# Altium PCB Armadeus.PcbDoc (part 2 of 3)
Units mm, origin at the board's own origin, x right, y up, seen from the top; angles counter-clockwise.
Board outline 152.4 x 101.6 mm, 6 copper layers (Top Layer, MidLayer1, MidLayer2, MidLayer3, MidLayer4, Bottom Layer); 160 components, 306 nets, 1227 pads, 661 vias.
Unrouted connection lines stored in the file: 23.
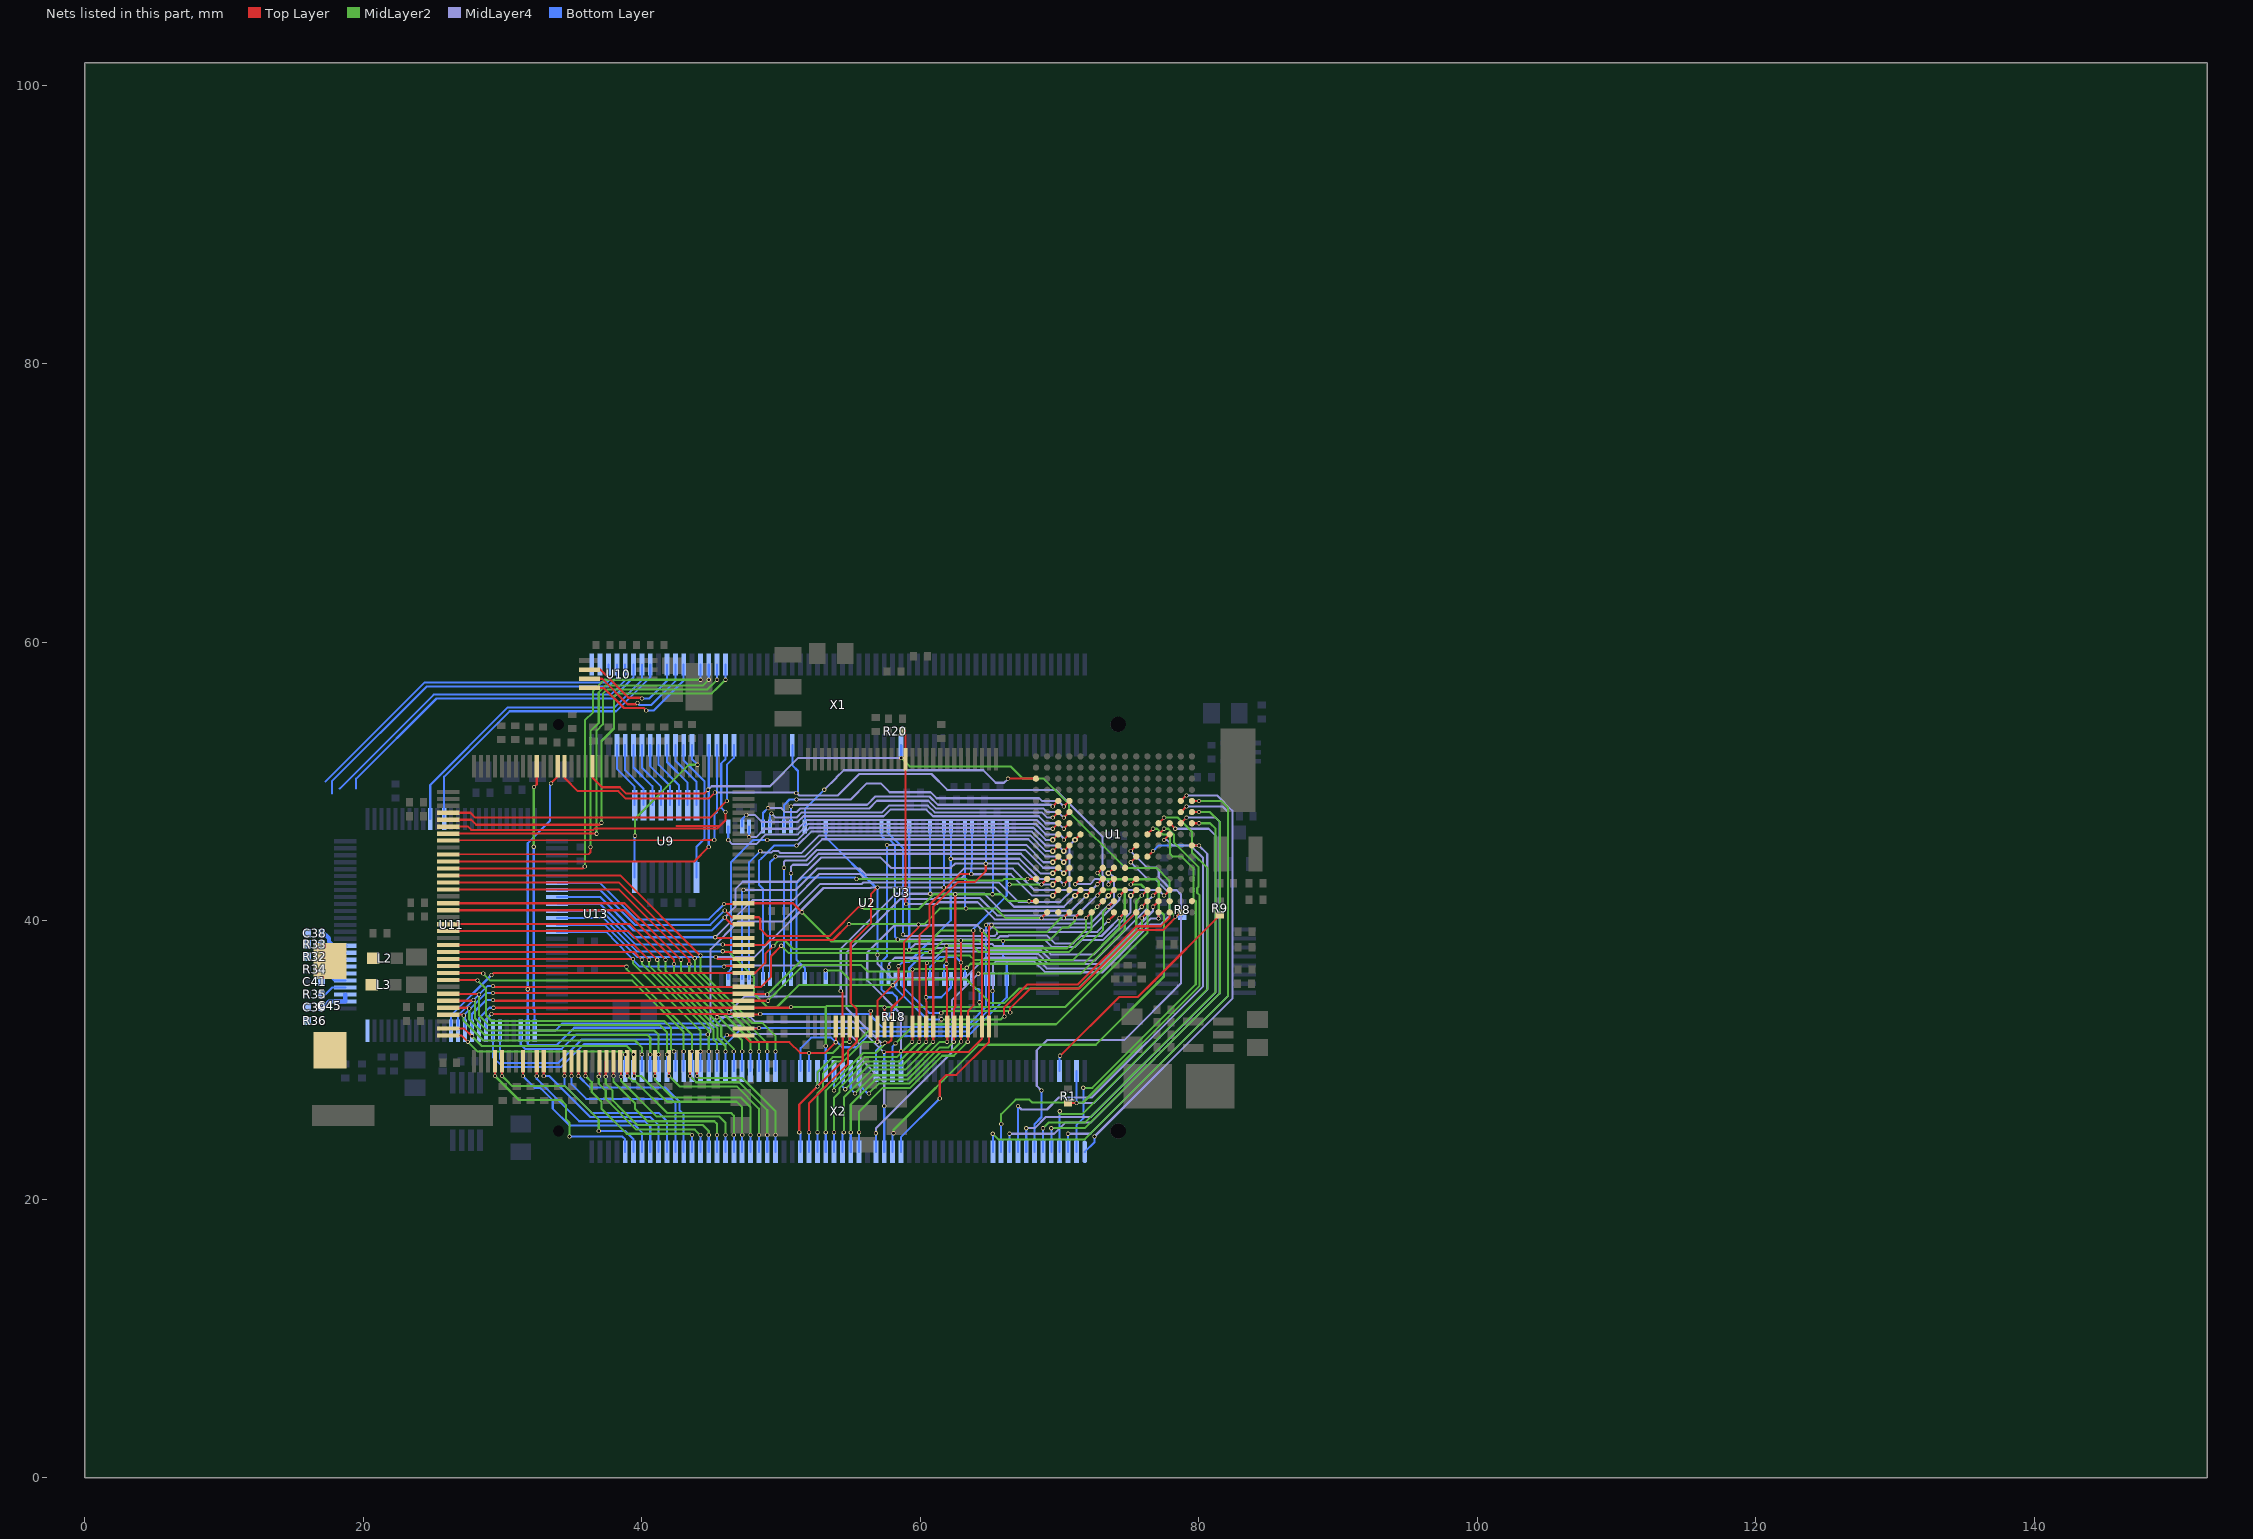
[diagram p6: the nets of this part, all layers, seen from the top]

## Via types
v1: diameter 0.3, hole 0.2, Top Layer to MidLayer2, 182 vias
v2: diameter 0.3, hole 0.2, Top Layer to Bottom Layer, 180 vias
v3: diameter 0.3, hole 0.2, MidLayer2 to Bottom Layer, 120 vias
v4: diameter 0.3, hole 0.2, MidLayer4 to Bottom Layer, 73 vias
v5: diameter 0.3, hole 0.2, Top Layer to MidLayer4, 49 vias
v6: diameter 0.3, hole 0.2, Top Layer to MidLayer3, 34 vias
v7: diameter 0.4, hole 0.2, Top Layer to MidLayer4, 15 vias
v8: diameter 0.3, hole 0.2, Top Layer to MidLayer1, 6 vias
v9: diameter 0.3, hole 0.2, MidLayer2 to MidLayer4, 2 vias

## Nets (pads, with @x,y where several pads share a name; then routed paths per layer and width w, separated by ;. In a path a pad name is that pad's centre, name@x,y a point inside that pad or via, vN(x,y) a via of type N, cw(c..) or ccw(c..) an arc to the next point about the centre after c; other vN are vias at no path point) (continued)
ADC0: U9.1 X1.57 | length 4.8
  Bottom Layer w0.15: X1.57@38.2,52.6 38.2,50.9 39.478,49.622 U9.1@39.478,48.3
ADC1: U9.2 X1.56 | length 4.8
  Bottom Layer w0.15: X1.56@38.8,52.6 38.8,50.8 40.113,49.487 U9.2@40.113,48.3
ADC2: U9.3 X1.55 | length 4.9
  Bottom Layer w0.15: X1.55@39.4,52.6 39.4,51 40.748,49.652 U9.3@40.748,48.3
ADC3: U9.4 X1.54 | length 4.9
  Bottom Layer w0.15: X1.54@40,52.6 40,51 41.383,49.617 U9.4@41.383,48.3
ADC4: U9.5 X1.53 | length 4.9
  Bottom Layer w0.15: X1.53@40.6,52.6 40.6,51.1 42.018,49.682 U9.5@42.018,48.3
ADC5: U9.6 X1.52 | length 4.9
  Bottom Layer w0.15: X1.52@41.2,52.6 41.2,51.2 42.653,49.747 U9.6@42.653,48.3
ADC6: U9.7 X1.51 | length 4.9
  Bottom Layer w0.15: X1.51@41.8,52.6 41.8,51.4 43.288,49.912 U9.7@43.288,48.3
ADC7: U9.8 X1.50 | length 4.9
  Bottom Layer w0.15: X1.50@42.4,52.6 42.4,51.5 43.923,49.977 U9.8@43.923,48.3
ADC8: U9.9 X1.49 | length 10.4
  Bottom Layer w0.15: X1.49@43,52.6 43,51.5 44.5,50 44.5,45.9 43.923,45.323 U9.9@43.923,43.1
ADC9: U9.16 X1.48 | length 11.9
  MidLayer2 w0.15: v3(39.5,46.1) 39.5,47.323 43.377,51.2 v3(44,51.2)
  Bottom Layer w0.15: U9.16@39.478,43.1 39.478,46.077 v3(39.5,46.1) ; X1.48@43.6,52.6 43.6,51.6 v3(44,51.2)
AGND: C38.2 C39.2 C41.1 C45.2 L3.2 R36.1 U11.25 U11.31 U11.32 X1.61
AVDD: C38.1 C39.1 C45.1 L2.2 R32.2 R33.2 U11.27 U11.28 U11.35 X1.62 | length 4.5
  Bottom Layer w0.3: C38.1@16.993,39.268 17.525,38.736 17.525,38.494 17.819,38.2 U11.35@18.7,38.2 ; C39.1@17.125,33.8 17.525,34.2 U11.27@18.7,34.2 U11.28@18.7,34.7
BOOT: R1.1 U1.J15 U1.K11 X2.119 | length 30.8
  Top Layer w0.15: R1.1@70.6,26.9 v2(71.2,26.9) ; U1.K11@76.3,44.6 v2(76.7,45) ; U1.J15@79.5,45.4 v2(80,45.4)
  MidLayer4 w0.15: v2(71.2,26.9) 72.455,26.9 80.6,35.045 80.6,44.8 v2(80,45.4)
  Bottom Layer w0.15: v2(71.2,26.9) X2.119@71.2,29.2 ; v2(76.7,45) 77.09,45.39 79.99,45.39 v2(80,45.4)
CLKO: R8.2 U13.55 X1.23 | length 51.9
  Top Layer w0.15: U13.55@36.45,51.1 36.45,50.267 37.136,49.581 38.414,49.581 38.872,49.124 44.475,49.124 v5(44.755,49.403)
  MidLayer2 w0.15: v4(58.623,51.689) 59.228,51.084 66.467,51.084 67.335,50.216 68.834,50.216 70.663,48.387 70.663,47.828 74.701,43.79 76.962,43.79 77.876,42.875 77.876,40.742 v3(78.308,40.31)
  MidLayer4 w0.15: v5(44.755,49.403) 45.009,49.657 49.2,49.657 51.232,51.689 v4(58.623,51.689)
  Bottom Layer w0.15: X1.23@58.6,52.6 58.623,52.577 v4(58.623,51.689) ; v3(78.308,40.31) 78.318,40.3 R8.2@78.8,40.3
CSI0: U1.E14 X2.1 | length 33.2
  Top Layer w0.15: U1.E14@78.7,48.6 v5(79.1,49)
  MidLayer4 w0.15: v4(72.5,24.5) 82.4,34.4 82.4,47.9 81.3,49 v5(79.1,49)
  Bottom Layer w0.15: X2.1@71.8,23.4 72.5,24.1 v4(72.5,24.5)
CSI1: U1.H11 X2.2 | length 29.8
  Top Layer w0.15: U1.H11@76.3,46.2 v1(76.7,46.6)
  MidLayer2 w0.15: v3(71.7,28) 72.344,28 79.775,35.431 79.775,41.408 79.604,41.58 79.604,43.764 78.765,44.602 78.13,44.602 77.925,44.808 77.925,46.086 77.811,46.2 77.4,46.2 77,46.6 v1(76.7,46.6)
  Bottom Layer w0.15: X2.2@71.2,23.4 71.2,25.3 71.7,25.8 v3(71.7,28)
CSI2: U1.F14 X2.3 | length 33.8
  Top Layer w0.15: U1.F14@78.7,47.8 v5(79.1,48.2)
  MidLayer4 w0.15: v4(70.6,24.7) 72.2,24.7 82.1,34.6 82.1,47.8 81.7,48.2 v5(79.1,48.2)
  Bottom Layer w0.15: X2.3@70.6,23.4 v4(70.6,24.7)
CSI3: U1.G12 X2.4 | length 32.2
  Top Layer w0.15: U1.G12@77.1,47 v1(77.5,47.4)
  MidLayer2 w0.15: v3(70.002,26.314) 69.977,26.289 69.977,26.111 71.622,26.111 80.625,35.114 80.625,43.757 79.539,44.843 79.5,44.882 79.5,46.4 78.5,47.4 v1(77.5,47.4)
  Bottom Layer w0.15: X2.4@70,23.4 70,25.959 70.002,25.961 v3(70.002,26.314)
CSI4: U1.F15 X2.5 | length 32.4
  Top Layer w0.15: U1.F15@79.5,47.8 v1(80,47.8)
  MidLayer2 w0.15: v3(69.4,25.1) 71.8,25.1 72.115,25.415 81.5,34.8 81.5,47.1 80.8,47.8 v1(80,47.8)
  Bottom Layer w0.15: X2.5@69.4,23.4 69.4,24.4 v3(69.4,25.1)
CSI5: U1.G15 X2.6 | length 31.7
  Top Layer w0.15: U1.G15@79.5,47 v1(80,47)
  MidLayer2 w0.15: v3(68.8,25.1) 69.2,25.5 71.8,25.5 81.2,34.9 81.2,46.6 80.8,47 v1(80,47)
  Bottom Layer w0.15: X2.6@68.8,23.4 v3(68.8,25.1)
CSI6: U1.J10 X2.7 | length 32.2
  Top Layer w0.15: v5(75.1,45) U1.J10@75.5,45.4
  MidLayer4 w0.15: v4(68.7,27.8) 68.351,28.149 68.351,30.683 69.088,31.42 74.625,31.42 78.716,35.511 78.716,41.883 78.41,42.189 78.041,42.189 77.597,42.634 77.597,42.647 77.114,43.129 77.114,43.637 76.937,43.815 76.285,43.815 v5(75.1,45) ; 78.511,35.331 78.537,35.331
  Bottom Layer w0.15: X2.7@68.2,23.4 68.2,25.4 68.7,25.9 v4(68.7,27.8)
CSI7: U1.G13 X2.8 | length 34.3
  Top Layer w0.15: U1.G13@77.9,47 v5(78.3,46.6)
  MidLayer4 w0.15: v4(67.6,25.1) 68.2,25.1 69,25.9 72.233,25.9 81.2,34.867 81.2,46.1 80.7,46.6 v5(78.3,46.6)
  Bottom Layer w0.15: X2.8@67.6,23.4 67.6,24.5 v4(67.6,25.1)
CSI8: U1.H13 X2.9 | length 33.9
  Top Layer w0.15: v5(77.5,45.8) U1.H13@77.9,46.2
  MidLayer4 w0.15: v4(67,26.7) 67.259,26.441 69.088,26.441 69.947,27.3 72.3,27.3 80.3,35.3 80.3,44.5 79.386,45.414 78.086,45.414 77.943,45.557 77.7,45.8 v5(77.5,45.8)
  Bottom Layer w0.15: X2.9@67,23.4 v4@67,26.6 ; 67,26.2 v4(67,26.7)
CSI9: U1.G14 X2.10 | length 36
  Top Layer w0.15: U1.G14@78.7,47 v5(79.1,47.4)
  MidLayer4 w0.15: v4(66.4,24.7) 69.6,24.7 70.4,25.5 72.222,25.5 81.5,34.778 ; v5(79.1,47.4) 81.2,47.4 81.5,47.1 ; 81.483,34.773 81.483,47.095
  Bottom Layer w0.15: X2.10@66.4,23.4 66.4,24.5 v4(66.4,24.7)
CSI10: U1.H12 X2.11 | length 34.1
  Top Layer w0.15: U1.H12@77.1,46.2 v1(77.5,46.6)
  MidLayer2 w0.15: v3(65.8,25.4) 65.8,26.105 66.847,27.153 67.818,27.153 68.026,26.945 71.678,26.945 80.05,35.317 80.05,41.819 79.883,41.986 79.883,42.342 79.959,42.418 79.959,43.866 78.2,45.625 78.2,46.2 77.8,46.6 v1(77.5,46.6)
  Bottom Layer w0.15: X2.11@65.8,23.4 v3(65.8,25.4)
CSI11: U1.E15 X2.12 | length 38.9
  Top Layer w0.15: U1.E15@79.5,48.6 v1(80,48.6)
  MidLayer2 w0.15: v3(65.2,24.7) 65.6,24.3 71.8,24.3 82.1,34.6 82.1,48.1 81.6,48.6 v1(80,48.6)
  Bottom Layer w0.15: X2.12@65.2,23.4 v3(65.2,24.7)
CTRL0: R20.1 U1.N8 U3.14 | length 28.9
  Top Layer w0.15: R20.1@58.7,53.6 58.925,53.375 58.925,41.253 v5(58.979,41.199) ; v7(73.5,41.8) U1.N8@73.9,42.2
  MidLayer4 w0.15: v5(58.979,41.199) 61.189,41.199 61.316,41.326 64.11,41.326 65.335,40.1 71.8,40.1 v7(73.5,41.8)
CTRL1: U1.M8 U13.59 X1.36 | length 50.7
  Top Layer w0.15: U13.59@34.45,51.1 34.45,50.25 35.4,49.3 38.306,49.3 38.838,48.768 44.806,48.768 v5(45.237,49.2) ; v5(73.5,42.6) U1.M8@73.9,43
  MidLayer4 w0.15: v5(45.237,49.2) 51.054,49.2 v4(51.079,49.174) ; v4@51.095,49.19 51.293,48.992 54.072,48.992 55.611,50.531 60.798,50.531 61.928,49.4 69.7,49.4 73.076,46.024 73.076,43.256 73.5,42.832 v5(73.5,42.6)
  Bottom Layer w0.15: X1.36@50.8,52.6 50.8,51.156 51.206,50.749 51.206,49.301 v4(51.079,49.174)
CTRL2: R18.1 U1.K3 U2.20 | length 26.6
  Top Layer w0.15: v7(69.5,44.2) U1.K3@69.9,44.6
  MidLayer4 w0.15: v4(57.607,45.441) 67.589,45.441 68.83,44.2 v7(69.5,44.2)
  Bottom Layer w0.15: R18.1@57.6,33.1 57.636,33.1 58.318,33.782 58.318,34.493 57.988,34.823 57.455,34.823 57.2,35.078 57.2,37.033 57.6,37.433 57.6,45.433 v4(57.607,45.441)
CTRL3: U1.N7 X2.26 | length 33.1
  Top Layer w0.15: v1@72.72,41.82 U1.N7@73.1,42.2
  MidLayer2 w0.15: v9(64.16,36.195) 71.506,36.195 74.676,39.365 74.676,42.062 74.498,42.24 73.152,42.24 v1(72.72,41.808)
  MidLayer4 w0.15: v4(56.8,24.734) 56.8,25.075 62.255,30.531 62.255,34.29 v9(64.16,36.195)
  Bottom Layer w0.15: X2.26@56.8,23.4 v4(56.8,24.734)
CTRL4: U1.M7 U11.3 X2.25 | length 75.1
  Top Layer w0.15: v5(72.72,42.621) U1.M7@73.1,43
  MidLayer4 w0.15: v4(44.729,31.826) 44.933,32.029 44.933,37.948 46.939,39.954 50.114,39.954 52.807,42.647 55.804,42.647 55.905,42.748 65.634,42.748 67.031,41.351 70.055,41.351 70.905,42.201 72.3,42.201 v5(72.72,42.621) ; 44.933,32.461 47.244,32.461 47.828,31.877 54.889,31.877 55.702,31.064 55.702,27.28 ; 55.702,30.074 57.404,28.372 v4(57.404,26.695)
  Bottom Layer w0.15: U11.3@31.3,32.1 31.3,31.108 31.608,30.8 34.254,30.8 35.281,31.826 v4(44.729,31.826) ; X2.25@57.4,23.4 57.4,26.691 v4(57.404,26.695)
CTRL5: U1.L7 X2.24 | length 37.9
  Top Layer w0.15: v1(72.72,43.42) U1.L7@73.1,43.8 U1.L7@72.983,43.683
  MidLayer2 w0.15: v3(58.064,24.74) 58.064,24.968 64.186,31.09 72.593,31.09 77.495,35.992 77.495,40.411 77.114,40.792 77.114,42.824 76.962,42.977 73.164,42.977 v1(72.72,43.42)
  Bottom Layer w0.15: X2.24@58,23.4 58,24.675 v3(58.064,24.74)
CTRL6: U1.N4
CTRL7: U1.R3
CTRL8: U1.R4 U3.55 X2.23 | length 25.8
  Top Layer w0.15: v2(61.392,27.229) 61.392,28.473 61.849,28.931 62.586,28.931 64.925,31.27 64.925,39.525 v1(65.1,39.7) ; v1(70.3,40.2) U1.R4@70.7,40.6
  MidLayer2 w0.15: v1(65.1,39.7) 65.6,39.2 69.1,39.2 70.1,40.2 v1(70.3,40.2)
  Bottom Layer w0.15: X2.23@58.6,23.4 58.6,24.437 v2(61.392,27.229)
CTRL9: U1.M5 U11.2 U13.60 X2.95 | length 82.9
  Top Layer w0.15: v2(33.477,49.86) 33.477,49.886 33.95,50.358 U13.60@33.95,51.1 ; v5(71.12,42.621) U1.M5@71.5,43
  MidLayer4 w0.15: v4(46.253,33.426) 47.396,34.569 54.686,34.569 ; 56.998,31.394 54.686,33.706 ; v4(57.277,31.14) 54.712,33.706 54.686,33.706 ; v5(71.12,42.621) 72.187,42.621 72.568,43.002 72.801,43.002 72.862,42.941 73.002,42.941 73.127,42.816 73.127,42.266 71.247,40.386 65.507,40.386 64.262,41.631 61.062,41.631 60.985,41.554 58.547,41.554 54.686,37.694 54.686,33.706
  Bottom Layer w0.15: v2(33.477,49.86) 33.401,49.784 33.401,47.168 31.8,45.567 31.8,31.161 31.886,31.075 33.894,31.075 35.128,32.309 45.136,32.309 v4(46.253,33.426) ; X2.95@56.8,29.2 56.8,30.638 57.277,31.115 v4(57.277,31.14)
  other v4: 31.801,35.077
CTRL10: U1.R5 U3.54 U11.1 U13.63 X2.96 | length 70.6
  Top Layer w0.15: v1(32.258,49.606) 32.45,49.798 U13.63@32.45,51.1 ; v2(57.379,30.582) 63.475,30.582 64.425,31.532 64.425,39.275 v1(64.4,39.3) ; v1(71.1,40.2) U1.R5@71.5,40.6
  MidLayer2 w0.15: v3(32.233,45.314) 32.233,49.581 v1(32.258,49.606) ; v1(64.4,39.3) 65.1,38.6 69.289,38.6 70.189,39.5 70.6,39.5 71.1,40 v1(71.1,40.2)
  MidLayer4 w0.15: v4(45.39,33.071) 47.803,33.071 48.133,32.741 55.169,32.741 57.328,30.582 v2(57.379,30.582)
  Bottom Layer w0.15: v3(32.233,45.314) 32.233,33.63 32.3,33.562 U11.1@32.3,32.1 33.776,32.1 34.29,32.614 44.933,32.614 v4(45.39,33.071) ; X2.96@57.4,29.2 57.4,30.56 v2(57.379,30.582) v2@57.4,30.509
CTRL11: U1.M10 X2.97 | length 28.4
  Top Layer w0.15: v1(75.1,42.6) U1.M10@75.5,43
  MidLayer2 w0.15: v3(58.217,31.191) 59.588,32.563 69.748,32.563 76.302,39.116 76.302,42.139 75.84,42.6 v1(75.1,42.6)
  Bottom Layer w0.15: X2.97@58,29.2 58,30.974 v3(58.217,31.191)
CTRL12: U1.M9
CTRL13: U1.N9 X2.98 | length 30.4
  Top Layer w0.15: v5(74.3,41.8) U1.N9@74.7,42.2
  MidLayer4 w0.15: v4(58.598,30.632) 58.598,33.299 56.185,35.712 56.185,37.719 58.141,39.675 64.084,39.675 64.459,39.3 64.9,39.3 65.1,39.5 72.3,39.5 74.3,41.5 v5(74.3,41.8)
  Bottom Layer w0.15: v4(58.598,30.632) 58.6,30.63 X2.98@58.6,29.2
CTRL14: U1.R10 | length 1.6
  Top Layer w0.15: 74.397,39.497 U1.R10@75.5,40.6
CTRL15: U1.L9
CTRL16: U1.N12 U2.16 | length 22.1
  Top Layer w0.15: v5(76.7,41.8) U1.N12@77.1,42.2
  MidLayer4 w0.15: v4(60.681,37.744) 60.985,38.049 64.872,38.049 65.024,37.897 68.605,37.897 69.346,37.156 72.556,37.156 76.3,40.9 76.3,41.4 v5(76.7,41.8)
  Bottom Layer w0.15: U2.16@59.2,35.8 59.2,36.6 60.344,37.744 v4(60.681,37.744)
CTRL17: U1.P11 U2.71 | length 28
  Top Layer w0.15: v5(75.9,41) U1.P11@76.3,41.4
  MidLayer4 w0.15: v4(59.2,37.9) 59.625,38.325 65.155,38.325 65.303,38.176 68.758,38.176 69.357,37.577 72.477,37.577 v5(75.9,41)
  Bottom Layer w0.15: v4(59.2,37.9) U2.71@59.2,46.76
CTRL18: U1.N11 U2.28 | length 29.3
  Top Layer w0.15: v1(75.9,41.8) U1.N11@76.3,42.2
  MidLayer2 w0.15: v3(53.188,36.424) 54.28,36.424 54.94,35.763 63.346,35.763 64.537,34.572 65.035,34.075 66.028,34.075 67.086,35.133 71.333,35.133 75.5,39.3 75.5,41.4 v1(75.9,41.8)
  Bottom Layer w0.15: v3@53.188,36.398 53.2,36.386 U2.28@53.2,35.8
CTRL19: U1.R12 U2.59 | length 34.8
  Top Layer w0.15: v5(77.089,40.157) 77.1,40.168 U1.R12@77.1,40.6
  MidLayer4 w0.15: v4(56.921,37.541) 56.921,36.906 57.937,35.89 63.221,35.89 64.668,37.338 68.301,37.338 69.063,36.576 72.965,36.576 76.546,40.157 v5(77.089,40.157)
  Bottom Layer w0.15: U2.59@53.2,46.76 53.2,46 56.921,42.279 v4(56.921,37.541)
CTRL20: U1.R8 U2.68 | length 24.3
  Top Layer w0.15: v5(73.5,40) 73.9,40.4 U1.R8@73.9,40.6
  MidLayer4 w0.15: v4(58.75,39.014) 58.856,38.908 65.349,38.908 65.507,39.066 65.507,39.2 72.7,39.2 v5(73.5,40)
  Bottom Layer w0.15: U2.68@57.7,46.76 57.7,46.288 58.75,45.237 v4(58.75,39.014)
CTRL21: U1.P12 U2.19 | length 23.3
  Top Layer w0.15: v5(76.7,41) U1.P12@77.1,41.4
  MidLayer4 w0.15: v4(57.734,36.678) 57.734,36.906 58.166,37.338 61.053,37.338 61.489,37.774 64.715,37.774 64.872,37.617 68.453,37.617 69.19,36.881 72.881,36.881 76.7,40.7 v5(76.7,41)
  Bottom Layer w0.15: U2.19@57.7,35.8 57.7,36.643 v4(57.734,36.678)
CTRL22: U1.R13 U2.18 | length 25.1
  Top Layer w0.15: v1(66.04,33.122) 66,33.162 66,33.742 67.673,35.415 71.306,35.415 75.489,39.599 77.267,39.599 77.9,40.232 U1.R13@77.9,40.6
  MidLayer2 w0.15: v3(61.519,32.918) 65.786,32.918 65.989,33.122 v1(66.04,33.122)
  Bottom Layer w0.15: U2.18@58.2,35.8 58.2,35.196 60.477,32.918 v3(61.519,32.918)
CTRL23: U1.R14 U2.17 | length 24.6
  Top Layer w0.15: v1(66.446,33.401) 66.446,33.706 67.875,35.135 71.414,35.135 75.598,39.319 77.419,39.319 U1.R14@78.7,40.6
  MidLayer2 w0.15: v3(61.493,33.376) 61.643,33.525 66.322,33.525 v1(66.446,33.401)
  Bottom Layer w0.15: U2.17@58.7,35.8 58.7,35.305 60.63,33.376 v3(61.493,33.376)
CTRL24: U1.N13 U2.67 | length 31.4
  Top Layer w0.15: v5(77.5,41.8) U1.N13@77.9,42.2
  MidLayer4 w0.15: v4(58.369,38.659) 58.395,38.633 65.463,38.633 65.713,38.883 66.303,38.883 66.345,38.925 69.101,38.925 69.651,38.375 70.975,38.375 71.5,38.9 73,38.9 74.7,40.6 74.7,42.1 74.8,42.2 77.1,42.2 v5(77.5,41.8)
  Bottom Layer w0.15: U2.67@57.2,46.76 57.2,46.102 57.455,45.847 57.752,45.847 58.166,45.433 58.166,38.862 v4(58.369,38.659)
CTRL25: U1.P13
CTRL26: U1.P15
D0: U1.N10 U2.2 U3.33 U11.6 U13.1 X2.86 | length 63.9
  Top Layer w0.15: v2(46.1,31.8) 46.15,31.75 U13.1@47.3,31.75 47.775,31.275 50.589,31.275 51.359,30.505 53.155,30.505 v2(53.925,31.275) U3.33@53.925,32.4 ; v7(75.1,41.8) U1.N10@75.5,42.2
  MidLayer4 w0.15: v4(65.938,38.532) 66.142,38.608 68.961,38.608 69.469,38.1 71.089,38.1 71.589,38.6 73.1,38.6 75.1,40.6 v7(75.1,41.8)
  Bottom Layer w0.15: U11.6@29.8,32.1 29.8,30.1 30.125,29.775 33.975,29.775 35.671,31.471 45.771,31.471 v2(46.1,31.8) ; X2.86@51.4,29.2 51.4,30.85 52.148,31.598 53.602,31.598 v2(53.925,31.275) 54.025,31.275 54.388,30.912 55.397,30.912 56.21,31.725 63.436,31.725 63.74,32.029 ; 63.735,32.035 66.2,34.5 66.2,37.178 65.938,37.44 v4(65.938,38.532)
D1: U1.K10 U2.4 U3.35 U11.7 U13.2 X2.87 | length 72.2
  Top Layer w0.15: U13.2@47.3,32.25 v2@48.35,32.25 ; v2@54.925,31.325 U3.35@54.925,32.4 ; v5(75.1,44.2) U1.K10@75.5,44.6
  MidLayer2 w0.15: v3(52,30.5) 53.7,30.5 54.5,31.3 v2(54.9,31.3)
  MidLayer4 w0.15: v4@65.227,35.001 65.227,36.881 65.409,37.063 68.187,37.063 68.953,36.297 73.074,36.297 76.514,39.736 77.277,39.736 77.876,40.335 77.876,41.965 76.839,43.002 76.298,43.002 v5(75.1,44.2)
  Bottom Layer w0.15: U11.7@29.3,32.1 29.3,30.2 30,29.5 34.2,29.5 35.85,31.15 46.05,31.15 47.2,32.3 56.168,32.3 56.439,32.029 63.329,32.029 65.2,33.9 v4@65.2,34.95 ; X2.87@52,29.2 v3(52,30.5) ; v2(54.9,31.3) 54.9,32.285 54.915,32.3 ; v4@65.2,34.974 U2.4@65.2,35.8
  other v2: 48.4,32.3
  other v4: 65.176,34.95
D2: U1.L8 U2.5 U3.38 U11.8 U13.4 X2.88 | length 66.5
  Top Layer w0.15: v2(29.2,33.3) 47.25,33.3 U13.4@47.3,33.25 48.45,33.25 v2(48.5,33.3) ; U3.38@56.425,32.4 v2@56.425,33.511 ; v7(73.5,43.4) U1.L8@73.9,43.8
  MidLayer2 w0.15: v3(52.6,28.1) 52.6,29.1 53.7,30.2 54.4,30.2 56.439,32.239 v2(56.439,33.525)
  MidLayer4 w0.15: v4(64.7,39.7) 64.8,39.8 72.2,39.8 73.9,41.5 73.9,43.1 73.6,43.4 v7(73.5,43.4)
  Bottom Layer w0.15: U11.8@28.8,32.1 28.8,32.9 v2(29.2,33.3) ; v2(48.5,33.3) 56.311,33.3 57.252,32.36 63.271,32.36 64.163,33.252 ; v3(52.6,28.1) X2.88@52.6,29.2 ; v2(56.439,33.525) 56.439,33.223 56.515,33.147 ; 64.163,33.263 64.7,33.8 U2.5@64.7,35.8 64.7,38.6 v4(64.7,39.7)
D3: U1.R11 U2.7 U3.40 U11.9 U13.5 X2.89 | length 60.9
  Top Layer w0.15: v2(29.35,33.75) v1@50.65,33.75 ; U3.40@57.425,32.4 v1(57.425,33.775) ; v1(75.9,40.2) U1.R11@76.3,40.6
  MidLayer2 w0.15: v1(50.7,33.8) 53.2,33.8 ; v3(53.2,31) 53.2,33.8 ; 64.237,33.8 v3(64.237,34.138) ; v1(75.9,40.2) 75.9,39.3 70.4,33.8 57.45,33.8 v1(57.425,33.775) 57.316,33.884 53.284,33.884 53.2,33.8
  Bottom Layer w0.15: U11.9@28.3,32.1 28.3,33 29.05,33.75 v2(29.35,33.75) ; X2.89@53.2,29.2 v3(53.2,31) ; U2.7@63.703,35.797 U2.7@63.7,35.8 63.7,35.36 63.96,35.1 64.189,35.1 64.237,35.052 v3(64.237,34.138)
D4: U1.R9 U2.8 U3.44 U11.10 U13.6 X2.90 | length 66.5
  Top Layer w0.15: v2@29.35,34.25 v1(49.05,34.25) ; v1@59.425,31.325 59.425,35.585 59.436,35.596 v1(59.436,36.5) ; v1(74.3,40.2) U1.R9@74.7,40.6
  MidLayer2 w0.15: v1(49.05,34.25) 49.666,34.866 ; 49.657,34.874 51.613,36.83 55.728,36.83 56.21,36.347 59.284,36.347 59.461,36.525 63.221,36.525 63.602,36.906 71.73,36.906 74.3,39.477 v1(74.3,40.2) ; v3(53.8,27.8) 53.8,28 56,30.2 58.3,30.2 v1(59.4,31.3)
  Bottom Layer w0.15: U11.10@27.8,32.1 27.8,33.3 28.8,34.3 v2(29.3,34.3) ; v3(53.8,27.8) X2.90@53.8,29.2 ; U2.8@63.2,35.8 63.2,36.505 v3(63.322,36.627)
D5: U1.P8 U2.10 U3.46 U11.11 U13.7 X2.91 | length 69.3
  Top Layer w0.15: v2(29.3,34.8) 47.25,34.8 U13.7@47.3,34.75 v1@48.95,34.75 ; 60.4,35.889 60.4,34.225 60.425,34.2 v1@60.425,31.325 ; 60.401,35.89 60.401,36.881 v1(60.477,36.957) ; v1(73.5,41) U1.P8@73.9,41.4
  MidLayer2 w0.15: v1(49,34.7) 51.409,37.109 61.56,37.109 61.941,37.49 63.551,37.49 63.856,37.186 70.968,37.186 73.1,39.318 73.1,40.6 v1(73.5,41) ; v3(54.6,27.9) 56.3,29.6 58.7,29.6 v1(60.4,31.3) ; v1(60.477,36.957) 60.477,37.084 60.503,37.109
  Bottom Layer w0.15: U11.11@27.3,32.1 27.3,33.311 28.789,34.8 v2(29.3,34.8) ; X2.91@54.4,29.2 54.4,28.1 v3(54.6,27.9) ; v2(60.4,34.5) 61.5,34.5 62.2,35.2 U2.10@62.2,35.8
D6: U1.P7 U2.11 U3.49 U11.12 U13.8 X2.92 | length 71.2
  Top Layer w0.15: v2@29.35,35.25 48.56,35.25 49.276,35.966 49.276,37.465 v1(50.013,38.202) ; v1(61.874,38.202) 61.874,36.627 61.9,36.601 61.9,32.425 U3.49@61.925,32.4 61.925,31.325 v1(61.9,31.3) ; v1(72.7,41) U1.P7@73.1,41.4
  MidLayer2 w0.15: v1(50.013,38.202) 50.521,37.694 61.366,37.694 v1(61.874,38.202) 63.754,38.202 64.211,37.744 70.663,37.744 72.3,39.382 72.3,40.6 v1(72.7,41) ; v3(55.3,27.6) 56.6,28.9 59,28.9 61.4,31.3 v1(61.9,31.3)
  Bottom Layer w0.15: U11.12@26.8,32.1 26.8,33.2 28.9,35.3 v2(29.3,35.3) ; X2.92@55,29.2 55,27.9 v3(55.3,27.6) ; U2.11@61.7,35.8 61.7,36.8 61.768,36.8 v2(61.874,36.906)
D7: U1.R6 U2.13 U3.51 U11.13 U13.10 X2.93 | length 72.9
  Top Layer w0.15: v2(29.2,36.1) 29.35,36.25 48.137,36.25 48.87,36.982 48.87,37.617 v1(49.428,38.176) ; v1(62.89,38.583) 62.9,38.573 62.9,32.425 U3.51@62.925,32.4 v1(62.925,31.325) ; v1(71.9,40.2) U1.R6@72.3,40.6
  MidLayer2 w0.15: v1(49.428,38.176) 49.835,38.583 50.241,38.583 50.851,37.973 61.036,37.973 61.646,38.583 64.211,38.583 64.77,38.024 70.536,38.024 71.9,39.388 v1(71.9,40.2) ; v3(56.3,27.6) 57,28.3 59.178,28.3 61.478,30.6 62.2,30.6 v1(62.925,31.325)
  Bottom Layer w0.15: U11.13@26.3,32.1 26.3,33.2 v2(29.2,36.1) ; X2.93@55.6,29.2 55.6,28.2 56.2,27.6 v3(56.3,27.6) ; U2.13@60.7,35.8 60.7,36.7 61.389,37.389 62.535,37.389 v2(62.916,37.008)
D8: U1.N6 U2.74 U3.34 U11.89 U13.11 X2.35 | length 64.4
  Top Layer w0.15: v2@45.95,36.75 U13.11@47.3,36.75 ; v2(51.3,24.8) 51.3,26.8 54.425,29.925 U3.34@54.425,32.4 54.4,34.1 54.4,34.83 v2(54.28,34.95) ; v7(71.9,41.8) U1.N6@72.3,42.2
  MidLayer4 w0.15: v2(45.9,36.7) 45.984,36.784 54.28,36.784 54.28,37.973 58.242,41.935 64.592,41.935 65.811,40.716 70.816,40.716 v7(71.9,41.8) ; 54.229,36.784 54.28,36.733 v2(54.28,34.95)
  Bottom Layer w0.15: U11.89@33.9,39.2 37.444,39.2 39.844,36.7 v2(45.9,36.7) ; v2(51.3,24.8) 51.4,24.7 X2.35@51.4,23.4 ; U2.74@60.7,46.76 60.7,42.316 60.706,42.31 v4(60.706,41.935)
D9: U1.N5 U2.76 U3.36 U11.88 U13.12 X2.34 | length 69.6
  Top Layer w0.15: v2(45.3,37.4) 45.45,37.25 U13.12@47.3,37.25 ; v2(52,24.8) 52,26.9 54.637,29.537 54.788,29.688 54.788,30.656 55.425,31.293 U3.36@55.425,32.4 U3.36@55.422,32.664 ; U3.36@55.423,32.664 55.423,33.655 55,34.078 55,38.388 56.46,39.848 56.46,41.931 v5(56.921,42.393) ; v7(71.1,41.8) U1.N5@71.5,42.2
  MidLayer4 w0.15: v2(45.3,37.4) 48.093,37.4 53.04,42.346 56.443,42.346 56.49,42.393 65.329,42.393 66.721,41 70.3,41 v7(71.1,41.8) ; v4(61.671,42.393) v4@61.722,42.443
  Bottom Layer w0.15: U11.88@33.9,39.7 37.333,39.7 39.633,37.4 v2(45.3,37.4) ; X2.34@52,23.4 v2(52,24.8) ; v4(61.671,42.393) 61.7,42.421 U2.76@61.7,46.76
D10: U1.M4 U2.77 U3.39 U11.87 U13.13 X2.33 | length 67.7
  Top Layer w0.15: v2(45.8,37.8) 45.85,37.75 U13.13@47.3,37.75 ; v1@56.925,31.325 56.925,34.275 58.42,35.77 v2@58.42,36.779 ; v5(70.3,42.6) U1.M4@70.7,43
  MidLayer2 w0.15: v2(45.8,37.8) 46.2,37.8 48.057,35.943 48.057,34.74 48.997,33.8 49.7,33.8 51.268,35.368 v1(58.018,35.368) ; v3(52.6,24.8) 52.6,27.6 53,28 53,29 53.9,29.9 54.5,29.9 55.9,31.3 v1(56.9,31.3)
  MidLayer4 w0.15: v4@62.154,44.425 v4(62.179,44.45) 67.107,44.45 68.555,43.002 69.24,43.002 ; 69.24,43 69.9,43 v5(70.3,42.6)
  Bottom Layer w0.15: U11.87@33.9,40.2 37.222,40.2 39.622,37.8 v2(45.8,37.8) ; X2.33@52.6,23.4 v3(52.6,24.8) ; v2(58.42,36.728) 58.725,37.033 59.182,37.033 62.179,40.03 v4(62.179,44.45) 62.2,44.471 U2.77@62.2,46.76
D11: U1.R2 U2.79 U3.41 U11.86 U13.14 X2.32 | length 63.3
  Top Layer w0.15: v2@45.85,38.25 48.816,38.25 49.179,38.612 53.725,38.612 v2(54.864,39.751) ; v1(57.455,31.242) 57.734,31.242 57.925,31.433 57.925,33.731 58.826,34.633 58.826,38.481 59.868,39.522 v1(59.868,39.726) ; v1(68.7,40.2) U1.R2@69.1,40.6
  MidLayer2 w0.15: v3(53.2,24.8) 53.2,27.8 55.9,30.5 56.794,30.5 57.455,31.16 v1(57.455,31.242) ; v2(54.864,39.751) 59.588,39.751 ; 59.614,39.751 60.274,39.751 61.392,40.869 65.431,40.869 66.1,40.2 v1(68.7,40.2)
  Bottom Layer w0.15: U11.86@33.9,40.7 37.111,40.7 39.511,38.3 v2(45.8,38.3) ; X2.32@53.2,23.4 v3(53.2,24.8) ; U2.79@63.2,46.76 63.2,40.94 v3(63.271,40.869)
D12: U1.N3 U2.80 U3.45 U11.85 U13.15 X2.31 | length 71.4
  Top Layer w0.15: v2(45.263,38.811) 45.324,38.75 U13.15@47.3,38.75 ; v1(59.9,31.3) 59.925,31.325 59.925,38.95 60.65,39.675 60.65,41.143 62.865,43.358 v2(63.652,43.358) ; v7(69.5,41.8) U1.N3@69.9,42.2
  MidLayer2 w0.15: v3(53.8,24.8) 53.8,27.3 54.2,27.7 54.2,28 56.1,29.9 58.5,29.9 v1(59.9,31.3)
  MidLayer4 w0.15: v2@45.274,38.8 v2(45.263,38.811) 47.952,41.5 50.898,41.5 52.756,43.358 55.651,43.358 55.986,43.023 62.911,43.023 63.246,43.358 v2(63.652,43.358) 63.678,43.332 66.497,43.332 68.03,41.8 v7(69.5,41.8)
  Bottom Layer w0.15: U11.85@33.9,41.2 37,41.2 39.4,38.8 39.411,38.811 v2(45.263,38.811) ; X2.31@53.8,23.4 v3(53.8,24.8) ; v2(63.652,43.358) 63.652,43.739 63.678,43.764 63.678,44.047 63.7,44.069 U2.80@63.7,46.76
D13: U1.M3 U2.82 U3.47 U11.84 U13.17 X2.30 | length 72.4
  Top Layer w0.15: v2(45.949,40.234) 46.432,39.75 U13.17@47.3,39.75 ; v1@60.925,31.325 60.925,41.011 62.687,42.774 63.906,42.774 64.694,43.561 v2(64.694,44.094) ; v7(69.5,42.6) U1.M3@69.9,43
  MidLayer2 w0.15: v3(54.5,24.8) 54.5,27.3 56.5,29.3 58.9,29.3 v1(60.9,31.3)
  MidLayer4 w0.15: v2(45.949,40.234) 46.711,40.996 46.711,42.266 47.244,42.799 51.13,42.799 52.862,44.531 57.146,44.531 57.887,43.79 62.179,43.79 62.484,44.094 67.031,44.094 68.525,42.6 v7(69.5,42.6)
  Bottom Layer w0.15: U11.84@33.9,41.7 37,41.7 39.4,39.3 45.015,39.3 v2(45.949,40.234) ; X2.30@54.4,23.4 54.4,24.7 v3(54.5,24.8) ; v2(64.694,44.094) 64.7,44.101 U2.82@64.7,46.76
D14: U1.P1 U2.83 U3.50 U11.83 U13.18 X2.29 | length 66.8
  Top Layer w0.15: v2(45.949,40.742) 46.44,40.25 48.4,40.25 48.5,40.15 48.5,39.409 49.022,38.887 53.467,38.887 55.575,40.996 v1(55.829,40.996) ; v1@62.425,31.325 62.425,33.725 62.5,33.8 v1(62.5,41.9) ; v1(67.8,41.4) U1.P1@68.3,41.4
  MidLayer2 w0.15: v3(55,24.8) 55,26.8 56.8,28.6 59.089,28.6 61.389,30.9 62,30.9 v1(62.4,31.3) ; v1(55.829,40.996) 55.982,40.843 59.893,40.843 60.95,41.9 65.8,41.9 66.3,41.4 v1(67.8,41.4)
  Bottom Layer w0.15: U11.83@33.9,42.2 37,42.2 39.5,39.7 44.907,39.7 v2(45.949,40.742) ; X2.29@55,23.4 v3(55,24.8) ; v3@65.2,41.908 U2.83@65.2,46.76
  other v3: 65.176,41.9
D15: U1.M2 U2.85 U3.52 U11.82 U13.20 X2.28 | length 65.4
  Top Layer w0.15: v2(45.9,41.2) 47.25,41.2 U13.20@47.3,41.25 50.85,41.25 v1(51.5,40.6) ; v1(63.4,31.3) 63.425,31.325 63.425,33.528 63.8,33.903 v2(63.8,39.3) ; v1(68.7,42.6) U1.M2@69.1,43
  MidLayer2 w0.15: v1(51.5,40.6) 53.577,38.523 60.689,38.523 61.466,39.3 v2(63.8,39.3) ; v3(55.6,24.8) 55.6,26.3 57.3,28 59.267,28 61.567,30.3 62.4,30.3 v1(63.4,31.3) ; v3(66.4,42.6) v1(68.7,42.6)
  Bottom Layer w0.15: U11.82@33.9,42.7 37,42.7 39.6,40.1 44.8,40.1 v2(45.9,41.2) ; X2.28@55.6,23.4 v3(55.6,24.8) ; v2(63.8,39.3) 63.8,39.4 66.2,41.8 U2.85@66.2,46.76 ; 66.2,42.8 v3(66.4,42.6)
  other v1: 66.4,42.6
D16: U1.M1 U2.31 | length 24.7
  Top Layer w0.15: v1(67.7,43) U1.M1@68.3,43
  MidLayer2 w0.15: v3(55.4,43) 63.282,43 63.407,42.875 65.888,42.875 66.012,43 v1(67.7,43)
  Bottom Layer w0.15: U2.31@51.7,35.8 51.7,36.6 51.1,37.2 51.1,42.7 51.5,43.1 55.3,43.1 v3(55.4,43)
D17: U1.L3 U2.33 | length 28.5
  Top Layer w0.15: v7(69.5,43.4) U1.L3@69.9,43.8
  MidLayer2 w0.15: v7@69.4,43.4 v7(69.5,43.4)
  MidLayer4 w0.15: v4(50.7,43.4) 50.7,43.867 50.851,44.018 51.896,44.018 52.683,44.806 67.208,44.806 68.614,43.4 v7(69.5,43.4)
  Bottom Layer w0.15: U2.33@50.7,35.8 v4(50.7,43.4)
D18: U1.L4 U2.34 | length 30.1
  Top Layer w0.15: v7(70.3,43.4) U1.L4@70.7,43.8
  MidLayer4 w0.15: v4(50.2,43.8) 50.2,44.231 50.292,44.323 51.812,44.323 52.574,45.085 67.539,45.085 68.824,43.8 69.9,43.8 v7(70.3,43.4)
  Bottom Layer w0.15: U2.34@50.2,35.8 v4(50.2,43.8)
D19: U1.K4 U2.36 | length 31.4
  Top Layer w0.15: v7(70.3,44.2) U1.K4@70.7,44.6
  MidLayer4 w0.15: v4(49.6,44.6) 51.7,44.6 52.95,45.85 67.75,45.85 69,44.6 69.9,44.6 v7(70.3,44.2)
  Bottom Layer w0.15: U2.36@49.2,35.8 49.2,41.7 49.2,44.2 v4(49.6,44.6)
D20: U1.J4 U2.37 | length 32.5
  Top Layer w0.15: v7(70.3,45) U1.J4@70.7,45.4
  MidLayer4 w0.15: v4(51.1,45.4) 51.167,45.4 52.167,46.4 68,46.4 69,45.4 69.9,45.4 v7(70.3,45)
  Bottom Layer w0.15: U2.37@48.7,35.8 48.7,42.3 48.4,42.6 48.4,44.3 48.597,44.497 49.5,45.4 v4(51.1,45.4)
D21: U1.J3 U2.39 | length 32.2
  Top Layer w0.15: v7(69.5,45) U1.J3@69.9,45.4
  MidLayer4 w0.15: v4(48.5,45) 48.6,44.9 49.3,44.9 49.4,45 49.8,45 49.925,44.875 51.475,44.875 52.725,46.125 67.875,46.125 69,45 v7(69.5,45)
  Bottom Layer w0.15: U2.39@47.7,35.8 47.7,44.2 v4(48.5,45)
D22: U1.H5 U2.40 | length 35.7
  Top Layer w0.15: v7(71.1,45.8) U1.H5@71.5,46.2
  MidLayer4 w0.15: v4(47.3,42.2) 51.039,42.2 52.578,43.739 55.659,43.739 56.1,43.298 62.678,43.298 63.119,43.739 66.635,43.739 68.174,42.2 70.5,42.2 70.7,42.4 70.7,45.4 v7(71.1,45.8)
  Bottom Layer w0.15: U2.40@47.2,35.8 47.2,42.1 v4(47.3,42.2)
D23: U1.H3 U2.42 | length 33.5
  Top Layer w0.15: v7(69.5,45.8) U1.H3@69.9,46.2
  MidLayer4 w0.15: v4(49,45.8) 51.178,45.8 52.053,46.675 68.125,46.675 69,45.8 v7(69.5,45.8)
  Bottom Layer w0.15: U2.42@46.2,35.8 46.2,36.3 46.4,36.5 46.4,44.2 48,45.8 v4(49,45.8)
D24: U1.H4 U2.45 | length 26.9
  Top Layer w0.15: v5(70.3,45.8) U1.H4@70.7,46.2
  MidLayer4 w0.15: v4(46.2,45.8) 46.5,45.5 48.2,45.5 48.9,46.2 51.189,46.2 51.939,46.95 68.261,46.95 69,46.211 69,46.2 70,46.2 70.3,45.9 v5(70.3,45.8)
  Bottom Layer w0.15: v4(46.2,45.8) U2.45@46.2,46.76
D25: U1.G4 U2.47 | length 25.5
  Top Layer w0.15: v5(70.3,46.6) U1.G4@70.7,47
  MidLayer4 w0.15: v4(47.5,47.6) 48.1,47.6 48.6,47.1 51.2,47.1 51.6,47.5 57.363,47.5 57.844,47.981 60.427,47.981 60.907,47.5 68.5,47.5 69,47 69.9,47 v5(70.3,46.6)
  Bottom Layer w0.15: U2.47@47.2,46.76 47.2,47.3 v4(47.5,47.6)
D26: U1.G3 U2.48 | length 23.9
  Top Layer w0.15: v5(69.5,46.6) U1.G3@69.9,47
  MidLayer4 w0.15: v4(47.7,46) 48.2,46 48.8,46.6 51.2,46.6 51.825,47.225 68.375,47.225 69,46.6 v5(69.5,46.6)
  Bottom Layer w0.15: v4(47.7,46) U2.48@47.7,46.76
D27: U1.F4 U2.50 | length 24.2
  Top Layer w0.15: v5(70.3,47.4) U1.F4@70.7,47.8
  MidLayer4 w0.15: v4(49.047,48.082) 50.01,48.082 50.292,47.8 51.1,47.8 51.35,48.05 56.305,48.05 56.871,48.616 60.569,48.616 61.135,48.05 68.85,48.05 69.1,47.8 69.9,47.8 v5(70.3,47.4)
  Bottom Layer w0.15: U2.50@48.7,46.76 48.7,47.735 v4(49.047,48.082)
D28: U1.F3 U2.51 | length 22.6
  Top Layer w0.15: v5(69.5,47.4) U1.F3@69.9,47.8
  MidLayer4 w0.15: v4(49.301,47.701) 49.603,47.4 51.1,47.4 51.475,47.775 57.249,47.775 57.734,48.26 60.536,48.26 61.021,47.775 68.725,47.775 69.1,47.4 v5(69.5,47.4)
  Bottom Layer w0.15: U2.51@49.2,46.76 49.2,47.6 v4(49.301,47.701)
D29: U1.E4 U2.53 | length 23.5
  Top Layer w0.15: v5(70.3,48.2) U1.E4@70.7,48.6
  MidLayer4 w0.15: v4(51.1,48.7) 51.117,48.717 55.016,48.717 56.159,49.86 57.15,49.86 57.785,49.225 60.738,49.225 61.169,48.793 68.523,48.793 68.717,48.6 69.9,48.6 v5(70.3,48.2)
  Bottom Layer w0.15: U2.53@50.2,46.76 50.2,48.3 50.6,48.7 v4(51.1,48.7)
D30: U1.E3 U2.54 | length 21.4
  Top Layer w0.15: v5(69.5,48.2) U1.E3@69.9,48.6
  MidLayer4 w0.15: v4(50.7,48.2) 50.925,48.325 56.174,48.325 56.769,48.92 60.654,48.92 61.249,48.325 69.375,48.325 v5(69.5,48.2)
  Bottom Layer w0.15: U2.54@50.7,46.76 v4(50.7,48.2)
D31: U1.C1 U2.56 | length 19.5
  Top Layer w0.15: v5(66.3,50.2) U1.C1@68.3,50.2
  MidLayer4 w0.15: v4(53.1,49.4) 53.983,50.284 ; 53.975,50.292 54.489,50.806 64.51,50.806 65.411,49.905 66.005,49.905 v5(66.3,50.2)
  Bottom Layer w0.15: U2.56@51.7,46.76 51.7,48 v4(53.1,49.4)
DAC0: U10.6 X1.70 | length 8.1
  Top Layer w0.15: U10.6@36.225,58.025 37.022,58.025 39.04,56.007 39.954,56.007 v2(40.005,55.956)
  Bottom Layer w0.15: v2(40.005,55.956) 40.538,55.956 41.8,57.218 X1.70@41.8,58.4
DAC1: U10.7 X1.71 | length 8.9
  Top Layer w0.15: U10.7@36.225,57.375 37.139,57.375 38.968,55.545 39.594,55.545 v2(39.675,55.626)
  Bottom Layer w0.15: v2(39.675,55.626) 39.802,55.499 40.691,55.499 42.4,57.208 X1.71@42.4,58.4
DAC2: U10.8 X1.72 | length 9.5
  Top Layer w0.15: U10.8@36.225,56.725 37.255,56.725 37.255,56.674 ; 37.281,56.699 38.71,55.27 40.132,55.27 v2(40.31,55.093)
  Bottom Layer w0.15: v2(40.31,55.093) 40.843,55.093 43,57.249 X1.72@43,58.4
ETH0: R33.1 U11.34 X1.66 | length 26.5
  Bottom Layer w0.15: R33.1@17,38.3 17.225,38.3 17.824,37.7 U11.34@18.7,37.7 ; 19.482,49.505 19.482,50.19 25.248,55.956 37.871,55.956 39.4,57.485 X1.66@39.4,58.4
ETH1: R32.1 U11.33 X1.65 | length 26.6
  Bottom Layer w0.15: R32.1@17,37.4 17.2,37.2 U11.33@18.7,37.2 ; 18.288,49.479 25.04,56.231 37.757,56.231 38.8,57.274 X1.65@38.8,58.4
ETH2: R34.2 U11.30 X1.64 | length 27.4
  Bottom Layer w0.15: R34.2@17,36.5 17.119,36.5 17.919,35.7 U11.30@18.7,35.7 ; 17.755,49.124 17.755,50.038 24.536,56.82 37.567,56.82 38.2,57.453 X1.64@38.2,58.4
ETH3: R35.2 U11.29 X1.63 | length 26.4
  Bottom Layer w0.15: R35.2@17,34.7 17.25,34.7 17.75,35.2 U11.29@18.7,35.2 ; 17.272,49.987 24.38,57.095 37.453,57.095 37.6,57.242 X1.63@37.6,58.4
ETH4: U11.62 X1.68 | length 21.7
  Bottom Layer w0.15: U11.62@25.8,47.3 25.8,50.336 30.505,55.042 38.151,55.042 40.6,57.491 X1.68@40.6,58.4
ETH5: U11.60 X1.67 | length 21.9
  Bottom Layer w0.15: U11.60@24.8,47.3 24.8,49.743 30.374,55.317 38.037,55.317 40,57.28 X1.67@40,58.4
EXTAL16M: R9.2 X2.117 | length 16.8
  Top Layer w0.15: v2(70.028,30.302) 70.053,30.302 74.27,34.519 75.619,34.519 76.773,35.673 R9.2@81.5,40.4
  Bottom Layer w0.15: X2.117@70,29.2 70,30.274 v2(70.028,30.302)
FPGA0: U13.141 X2.38 | length 10.7
  Top Layer w0.15: v1(43.95,28.85) U13.141@43.95,29.9
  MidLayer2 w0.15: v1(43.95,28.85) 44.1,28.7 47.2,28.7 49.6,26.3 v3(49.6,24.6)
  Bottom Layer w0.15: X2.38@49.6,23.4 v3(49.6,24.6)
FPGA1: U13.140 X2.39 | length 10.6
  Top Layer w0.15: v1(43.45,28.85) U13.140@43.45,29.9
  MidLayer2 w0.15: v1(43.45,28.85) 43.9,28.4 47,28.4 49,26.4 v3(49,24.6)
  Bottom Layer w0.15: X2.39@49,23.4 v3(49,24.6)
FPGA2: U13.137 X2.40 | length 11.6
  Top Layer w0.15: v1(41.95,28.85) U13.137@41.95,29.9
  MidLayer2 w0.15: v1(41.95,28.85) 42.7,28.1 46.8,28.1 48.4,26.5 v3(48.4,24.6)
  Bottom Layer w0.15: X2.40@48.4,23.4 v3(48.4,24.6)
FPGA3: U13.135 X2.41 | length 12.2
  Top Layer w0.15: v1(40.95,28.85) U13.135@40.95,29.9
  MidLayer2 w0.15: v1(40.95,28.85) 40.95,28.55 42.2,27.3 47.1,27.3 47.8,26.6 v3(47.8,24.6)
  Bottom Layer w0.15: X2.41@47.8,23.4 v3(47.8,24.6)
FPGA4: U13.132 X2.42 | length 12.9
  Top Layer w0.15: v1(39.45,28.85) U13.132@39.45,29.9
  MidLayer2 w0.15: v1(39.45,28.85) 39.95,28.85 41.8,27 46.8,27 47.2,26.6 v3(47.2,24.6)
  Bottom Layer w0.15: X2.42@47.2,23.4 v3(47.2,24.6)
FPGA5: U13.131 X2.43 | length 12.5
  Top Layer w0.15: v1(38.95,28.85) U13.131@38.95,29.9
  MidLayer2 w0.15: v1(38.95,28.85) 39.331,28.469 39.531,28.469 41.799,26.201 46.399,26.201 46.6,26 v3(46.6,24.6)
  Bottom Layer w0.15: X2.43@46.6,23.4 v3(46.6,24.6)
FPGA6: U13.130 X2.44 | length 12.3
  Top Layer w0.15: U13.130@38.45,29.9 38.5,29.85 v1(38.5,28.8)
  MidLayer2 w0.15: v1(38.5,28.8) 38.5,28.5 41.074,25.926 45.574,25.926 46,25.5 v3(46,24.6)
  Bottom Layer w0.15: X2.44@46,23.4 v3(46,24.6)
FPGA7: U13.129 X2.45 | length 12.4
  Top Layer w0.15: v1(37.95,28.85) U13.129@37.95,29.9
  MidLayer2 w0.15: v1(37.95,28.85) 37.95,28.45 39.5,26.9 39.5,26.5 40.4,25.6 45.2,25.6 45.4,25.4 v3(45.4,24.6)
  Bottom Layer w0.15: X2.45@45.4,23.4 v3(45.4,24.6)
FPGA8: U13.128 X2.46 | length 12.3
  Top Layer w0.15: v1(37.4,28.8) 37.4,29.85 U13.128@37.45,29.9
  MidLayer2 w0.15: v1(37.4,28.8) 37.4,28.3 37.9,27.8 37.9,27.1 38.608,26.392 39.675,25.325 44.375,25.325 44.8,24.9 v3(44.8,24.6)
  Bottom Layer w0.15: X2.46@44.8,23.4 v3(44.8,24.6)
FPGA9: U13.127 X2.47 | length 12
  Top Layer w0.15: v1(36.9,28.8) 36.95,28.85 U13.127@36.95,29.9
  MidLayer2 w0.15: v1(36.9,28.8) 36.9,28.3 37.4,27.8 37.4,27.2 39.6,25 43.8,25 v3(44.2,24.6)
  Bottom Layer w0.15: X2.47@44.2,23.4 v3(44.2,24.6)
FPGA10: U13.125 X2.48 | length 12.4
  Top Layer w0.15: v1(35.95,28.85) U13.125@35.95,29.9
  MidLayer2 w0.15: v1(35.95,28.85) 36.4,28.4 36.4,27.7 37.1,27 37.1,26.5 38.9,24.7 43.5,24.7 v3(43.6,24.6) ; 36.787,27.313 36.8,27.313 36.8,27.3
  Bottom Layer w0.15: X2.48@43.6,23.4 v3(43.6,24.6)
FPGA11: U13.124 X2.49 | length 12.8
  Top Layer w0.15: v2(35.45,28.85) U13.124@35.45,29.9
  Bottom Layer w0.15: v2(35.45,28.85) 36.291,28.009 41.691,28.009 42.7,27 42.7,26.4 43,26.1 X2.49@43,23.4
FPGA12: U13.123 X2.50 | length 13.2
  Top Layer w0.15: v2(34.95,28.85) U13.123@34.95,29.9
  Bottom Layer w0.15: v2(34.95,28.85) 34.95,28.25 36,27.2 42.1,27.2 42.4,26.9 X2.50@42.4,23.4
FPGA13: U13.122 X2.51 | length 12.4
  Top Layer w0.15: v2(34.45,28.85) U13.122@34.45,29.9
  Bottom Layer w0.15: v2(34.45,28.85) 34.45,28.15 36.4,26.2 41.2,26.2 41.8,25.6 X2.51@41.8,23.4
FPGA14: U13.119 X2.52 | length 12.7
  Top Layer w0.15: v2(32.95,28.85) U13.119@32.95,29.9
  Bottom Layer w0.15: v2(32.95,28.85) 33.35,28.85 36.3,25.9 40.6,25.9 41.2,25.3 X2.52@41.2,23.4
FPGA15: U13.118 X2.53 | length 12.6
  Top Layer w0.15: v2(32.45,28.85) U13.118@32.45,29.9
  Bottom Layer w0.15: v2(32.45,28.85) 32.45,28.65 35.5,25.6 40.2,25.6 40.6,25.2 X2.53@40.6,23.4
FPGA16: U13.116 X2.54 | length 13
  Top Layer w0.15: v2(31.45,28.85) U13.116@31.45,29.9
  Bottom Layer w0.15: v2(31.45,28.85) 32.3,28 32.7,28 33.6,27.1 33.6,26.5 34.8,25.3 39.5,25.3 40,24.8 X2.54@40,23.4
FPGA17: U13.113 X2.55 | length 13.8
  Top Layer w0.15: v2(29.95,28.85) U13.113@29.95,29.9
  MidLayer2 w0.15: v2(29.95,28.85) 30.316,28.484 30.657,28.143 34.457,28.143 36.9,25.7 v3(36.9,24.9)
  Bottom Layer w0.15: v3(36.9,24.9) 38.8,24.9 39.4,24.3 X2.55@39.4,23.4
FPGA18: U13.112 X2.56 | length 14.4
  Top Layer w0.15: v2(29.45,28.85) U13.112@29.45,29.9
  MidLayer2 w0.15: v2(29.45,28.85) 31.173,27.127 34.188,27.127 34.544,26.772 34.544,25.756 34.8,25.5 v3(34.8,24.5)
  Bottom Layer w0.15: v3(34.8,24.5) 38.6,24.5 38.8,24.3 X2.56@38.8,23.4
FPGA19: U13.108 X2.65 | length 14.5
  Top Layer w0.15: U13.108@26.1,31.75 27.05,31.75 v1(27.5,31.3)
  MidLayer2 w0.15: v1(27.5,31.3) 28.2,30.6 38.6,30.6 v3(38.8,30.4)
  Bottom Layer w0.15: X2.65@38.8,29.2 v3@38.8,30.4
FPGA20: U13.107 X2.66 | length 15.3
  Top Layer w0.15: U13.107@26.1,32.25 27.25,32.25 v1(27.8,31.7)
  MidLayer2 w0.15: v1(27.8,31.7) 28.5,31 38.9,31 39.4,30.5 v3(39.4,30.4)
  Bottom Layer w0.15: X2.66@39.4,29.2 v3(39.4,30.4)
FPGA21: U13.105 X2.67 | length 16.8
  Top Layer w0.15: U13.105@26.1,33.25 27.15,33.25 v1(27.2,33.2)
  MidLayer2 w0.15: v1(27.2,33.2) 27.2,32.8 28.6,31.4 39.5,31.4 40,30.9 v3(40,30.4)
  Bottom Layer w0.15: X2.67@40,29.2 v3(40,30.4)
FPGA22: U13.104 X2.68 | length 18.3
  Top Layer w0.15: U13.104@26.1,33.75 27.55,33.75 v1(27.6,33.7)
  MidLayer2 w0.15: v1(27.6,33.7) 27.6,32.9 28.7,31.8 40.4,31.8 40.6,31.6 v3(40.6,30.4)
  Bottom Layer w0.15: X2.68@40.6,29.2 v3(40.6,30.4)
FPGA23: U13.103 X2.69 | length 19.5
  Top Layer w0.15: U13.103@26.1,34.25 27.85,34.25 v1(27.9,34.3)
  MidLayer2 w0.15: v1(27.9,34.3) 28.016,34.184 28.016,32.995 28.321,32.69 ; 28.316,32.684 28.9,32.1 40.9,32.1 41.2,31.8 v3(41.2,30.4)
  Bottom Layer w0.15: X2.69@41.2,29.2 v3(41.2,30.4)
FPGA24: U13.102 X2.70 | length 20.5
  Top Layer w0.15: U13.102@26.1,34.75 28.25,34.75 v1(28.3,34.7)
  MidLayer2 w0.15: v1(28.3,34.7) 28.3,33.2 29,32.5 41.3,32.5 41.8,32 v3(41.8,30.4)
  Bottom Layer w0.15: X2.70@41.8,29.2 v3(41.8,30.4)
FPGA25: U13.100 X2.71 | length 21.8
  Top Layer w0.15: U13.100@26.1,35.75 28.15,35.75 v1(28.2,35.7)
  MidLayer2 w0.15: v1(28.2,35.7) 28.8,35.1 28.8,33.2 29.2,32.8 41.6,32.8 42.1,32.3 42.1,30.8 v3(42.3,30.6)
  Bottom Layer w0.15: v3(42.3,30.6) 42.4,30.5 X2.71@42.4,29.2
FPGA26: U13.99 X2.72 | length 21.5
  Top Layer w0.15: U13.99@26.1,36.25 28.55,36.25 v1(28.6,36.2)
  MidLayer2 w0.15: v1(28.6,36.2) 29.1,35.7 39.311,35.7 43,32.011 v3(43,30.6)
  Bottom Layer w0.15: X2.72@43,29.2 v3(43,30.6)
FPGA27: U13.98 X2.73 | length 22.3
  Top Layer w0.15: U13.98@26.1,36.75 38.85,36.75 v1(38.9,36.7)
  MidLayer2 w0.15: v1(38.9,36.7) 38.9,36.5 43.6,31.8 v3(43.6,30.6)
  Bottom Layer w0.15: X2.73@43.6,29.2 v3(43.6,30.6)
FPGA28: U13.97 X2.74 | length 23.3
  Top Layer w0.15: U13.97@26.1,37.25 v1(39.35,37.25)
  MidLayer2 w0.15: v1(39.35,37.25) 39.35,36.95 44.2,32.1 v3(44.2,30.6)
  Bottom Layer w0.15: X2.74@44.2,29.2 v3(44.2,30.6)
FPGA29: U13.96 X2.75 | length 24.1
  Top Layer w0.15: U13.96@26.1,37.75 39.45,37.75 v1(40,37.2)
  MidLayer2 w0.15: v1(40,37.2) 40,36.9 44.8,32.1 v3(44.8,30.6)
  Bottom Layer w0.15: X2.75@44.8,29.2 v3(44.8,30.6)
FPGA30: U13.95 X2.76 | length 24.9
  Top Layer w0.15: U13.95@26.1,38.25 39.45,38.25 v1(40.5,37.2)
  MidLayer2 w0.15: v1(40.5,37.2) 40.5,36.8 45.15,32.15 45.15,31.45 45.4,31.2 v3(45.4,30.6)
  Bottom Layer w0.15: X2.76@45.4,29.2 v3(45.4,30.6)
FPGA31: U13.93 X2.77 | length 25.9
  Top Layer w0.15: U13.93@26.1,39.25 39.05,39.25 v1(41.1,37.2)
  MidLayer2 w0.15: v1(41.1,37.2) 41.2,37.1 41.2,36.5 45.425,32.275 45.425,31.575 46,31 v3(46,30.6)
  Bottom Layer w0.15: X2.77@46,29.2 v3(46,30.6)
FPGA32: U13.92 X2.78 | length 26.7
  Top Layer w0.15: U13.92@26.1,39.75 39.15,39.75 v1(41.7,37.2)
  MidLayer2 w0.15: v1(41.7,37.2) 41.7,36.4 45.7,32.4 45.7,31.7 46.6,30.8 v3(46.6,30.6)
  Bottom Layer w0.15: X2.78@46.6,29.2 v3(46.6,30.6)
FPGA33: U13.90 X2.79 | length 27.7
  Top Layer w0.15: U13.90@26.1,40.75 38.75,40.75 42.3,37.2 v1(42.3,36.9)
  MidLayer2 w0.15: v1(42.3,36.9) 42.3,36.3 47.2,31.4 v3(47.2,30.6)
  Bottom Layer w0.15: X2.79@47.2,29.2 v3(47.2,30.6)
FPGA34: U13.89 X2.80 | length 28.4
  Top Layer w0.15: U13.89@26.1,41.25 38.75,41.25 v1(42.8,37.2)
  MidLayer2 w0.15: v1(42.8,37.2) 42.8,36.4 47.8,31.4 v3(47.8,30.6)
  Bottom Layer w0.15: X2.80@47.8,29.2 v3(47.8,30.6)
FPGA35: U13.87 X2.81 | length 29.4
  Top Layer w0.15: U13.87@26.1,42.25 38.35,42.25 43.4,37.2 v1(43.4,36.9)
  MidLayer2 w0.15: v1(43.4,36.9) 43.4,36.331 47.65,32.08 ; 47.675,32.025 48.4,31.3 v3(48.4,30.6)
  Bottom Layer w0.15: X2.81@48.4,29.2 v3(48.4,30.6)
FPGA36: U13.86 X2.82 | length 30.2
  Top Layer w0.15: U13.86@26.1,42.75 38.35,42.75 v1(43.8,37.3)
  MidLayer2 w0.15: v1(43.8,37.3) 43.8,36.4 49,31.2 v3(49,30.6)
  Bottom Layer w0.15: X2.82@49,29.2 v3(49,30.6)
FPGA37: U13.85 X2.83 | length 31.4
  Top Layer w0.15: U13.85@26.1,43.25 38.45,43.25 v1(44.2,37.5)
  MidLayer2 w0.15: v1(44.2,37.5) 44.2,36.389 47.925,32.664 48.636,32.664 49.6,31.7 v3(49.6,30.6)
  Bottom Layer w0.15: X2.83@49.6,29.2 v3(49.6,30.6)
FPGA38: U13.84 X1.74 | length 31.8
  Top Layer w0.15: U13.84@26.1,43.75 35.75,43.75 v1(35.9,43.9)
  MidLayer2 w0.15: v1(35.9,43.9) 35.9,54.381 36.5,54.981 36.5,56.5 37.3,57.3 v3(44.2,57.3)
  Bottom Layer w0.15: v3(44.2,57.3) X1.74@44.2,58.4
FPGA39: U13.83 X1.46 | length 26.4
  Top Layer w0.15: U13.83@26.1,44.25 43.75,44.25 v2(44.8,45.3)
  Bottom Layer w0.15: v2(44.8,45.3) X1.46@44.8,52.6
FPGA40: U13.82 X1.75 | length 31.4
  Top Layer w0.15: U13.82@26.1,44.75 36.175,44.775 36.3,44.9 v1(36.3,45.3)
  MidLayer2 w0.15: v1(36.3,45.3) 36.3,53.6 36.9,54.2 36.9,56.4 37.4,56.9 44.4,56.9 v3(44.8,57.3)
  Bottom Layer w0.15: v3(44.8,57.3) X1.75@44.8,58.4
FPGA41: U13.80 X1.45 | length 26
  Top Layer w0.15: U13.80@26.1,45.75 44.5,45.8 v2(45.2,45.8)
  Bottom Layer w0.15: v2(45.2,45.8) 45.2,47.6 45.4,47.8 X1.45@45.4,52.6
FPGA42: U13.79 X1.76 | length 30.6
  Top Layer w0.15: U13.79@26.1,46.25 v1(36.75,46.25)
  MidLayer2 w0.15: v1(36.75,46.25) 36.75,53.65 37.2,54.1 37.2,56.3 37.5,56.6 44.7,56.6 v3(45.4,57.3)
  Bottom Layer w0.15: v3(45.4,57.3) X1.76@45.4,58.4
FPGA43: U13.78 X1.44 | length 29
  Top Layer w0.15: U13.78@26.1,46.75 27.52,46.75 27.745,46.525 36.517,46.525 36.601,46.609 45.39,46.609 46,47.219 v2(46,47.8) ; 42.5,46.8 45.581,46.8
  Bottom Layer w0.15: v2(46,47.8) 45.7,48.1 45.7,51.3 46,51.6 X1.44@46,52.6
FPGA44: U13.77 X1.77 | length 30.2
  Top Layer w0.15: U13.77@26.1,47.25 27.737,47.25 28.098,46.888 36.957,46.888 v1(37.1,47.031)
  MidLayer2 w0.15: v1(37.1,47.031) 37.1,52.9 38,53.8 38,56.1 38.225,56.325 45.025,56.325 45.397,56.697 v3(46,57.3)
  Bottom Layer w0.15: v3(46,57.3) X1.77@46,58.4
FPGA45: U13.76 X1.43 | length 24.9
  Top Layer w0.15: U13.76@26.1,47.75 27.688,47.75 28.042,47.396 44.896,47.396 v2(46.1,48.6)
  Bottom Layer w0.15: v2(46.1,48.6) 46.1,51.2 46.6,51.7 X1.43@46.6,52.6